# Altium PCB PCB_Main.PcbDoc (part 1 of 4)
Units mm, origin at the board's own origin, x right, y up, seen from the top; angles counter-clockwise.
Board outline 152.4 x 152.4 mm, 4 copper layers (Top Layer, GND1, GND2, Bottom Layer), stack 0.868 mm thick; 73 components, 60 nets, 294 pads, 5 vias.
Unrouted connection lines stored in the file: 166.
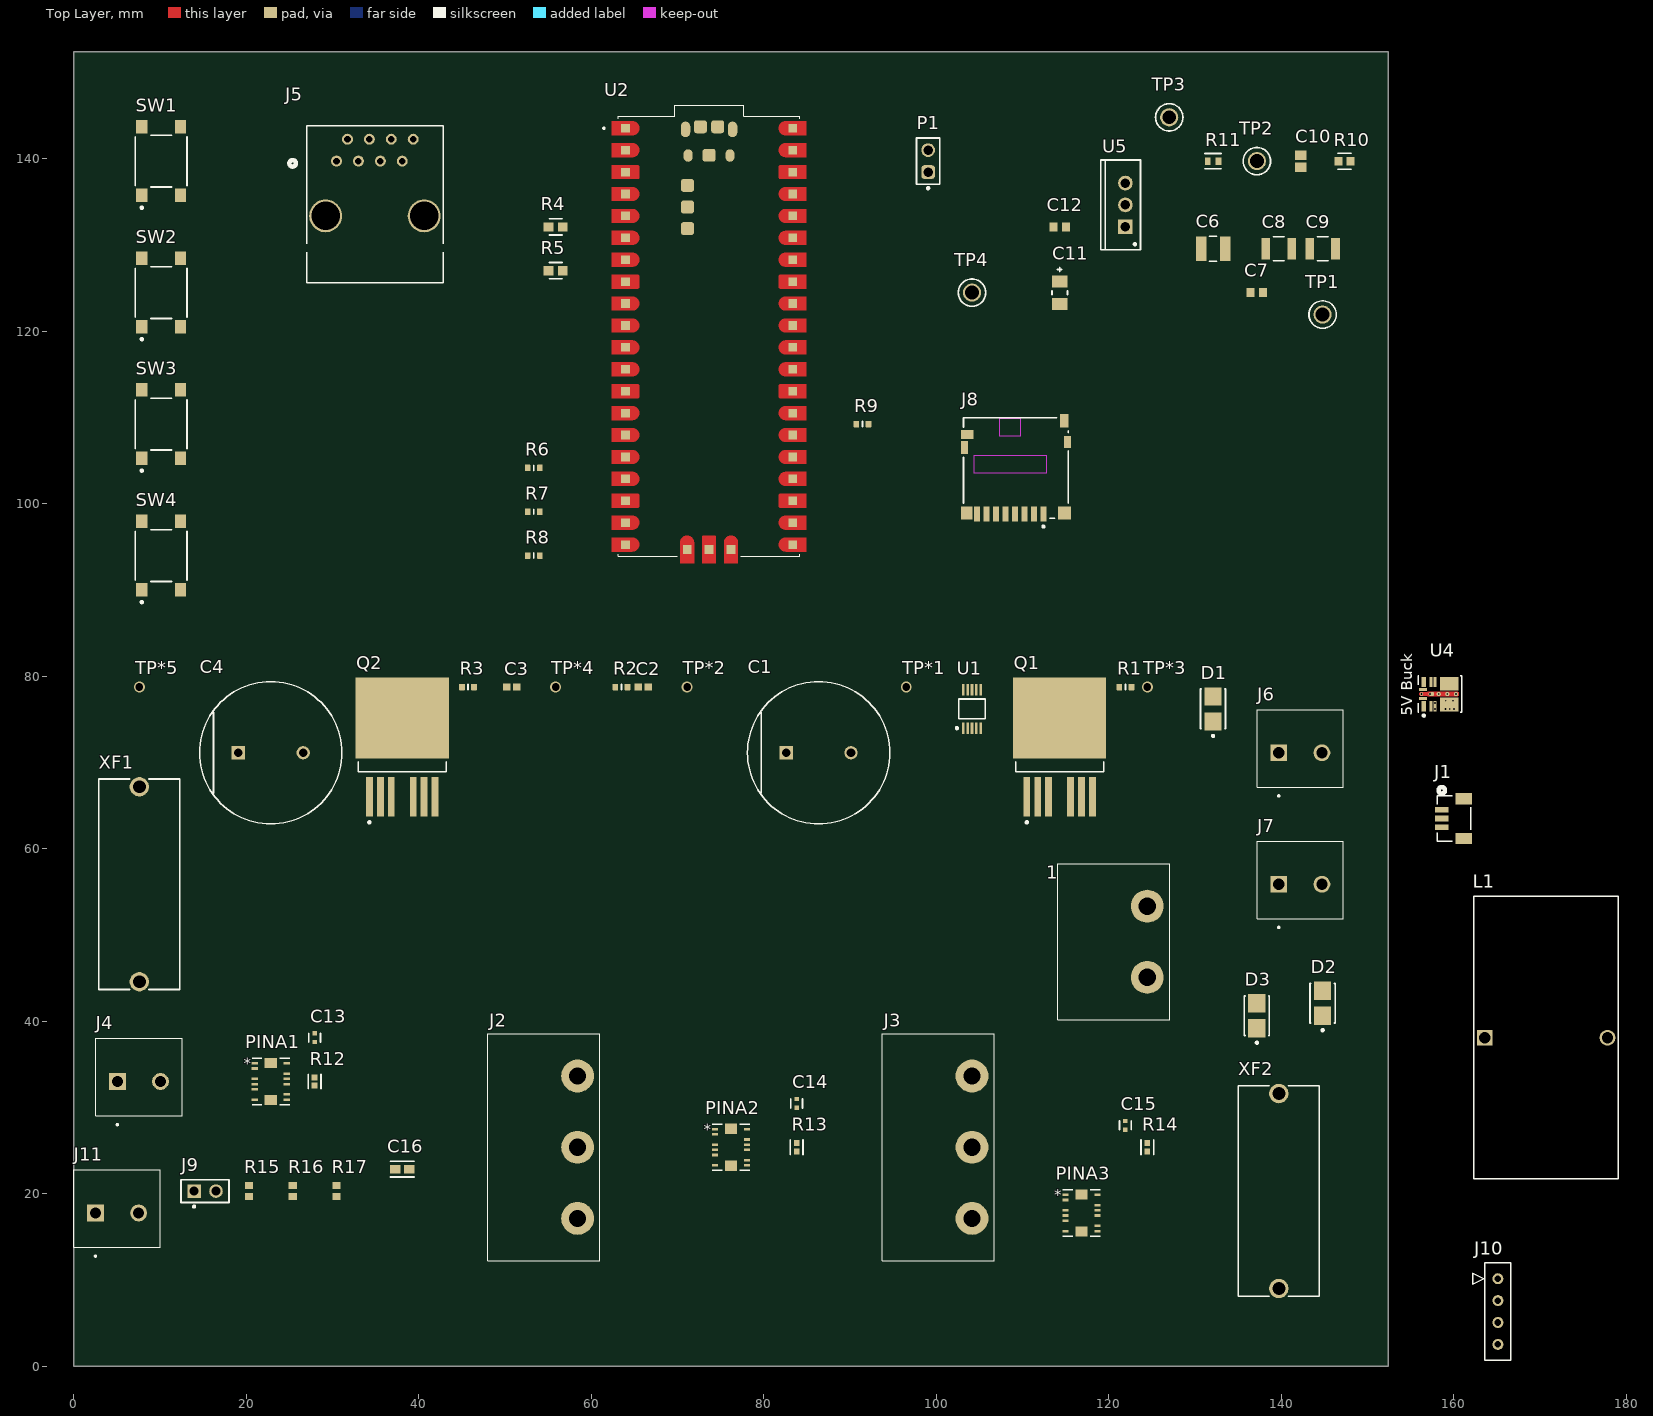
[diagram p0: Top Layer view]
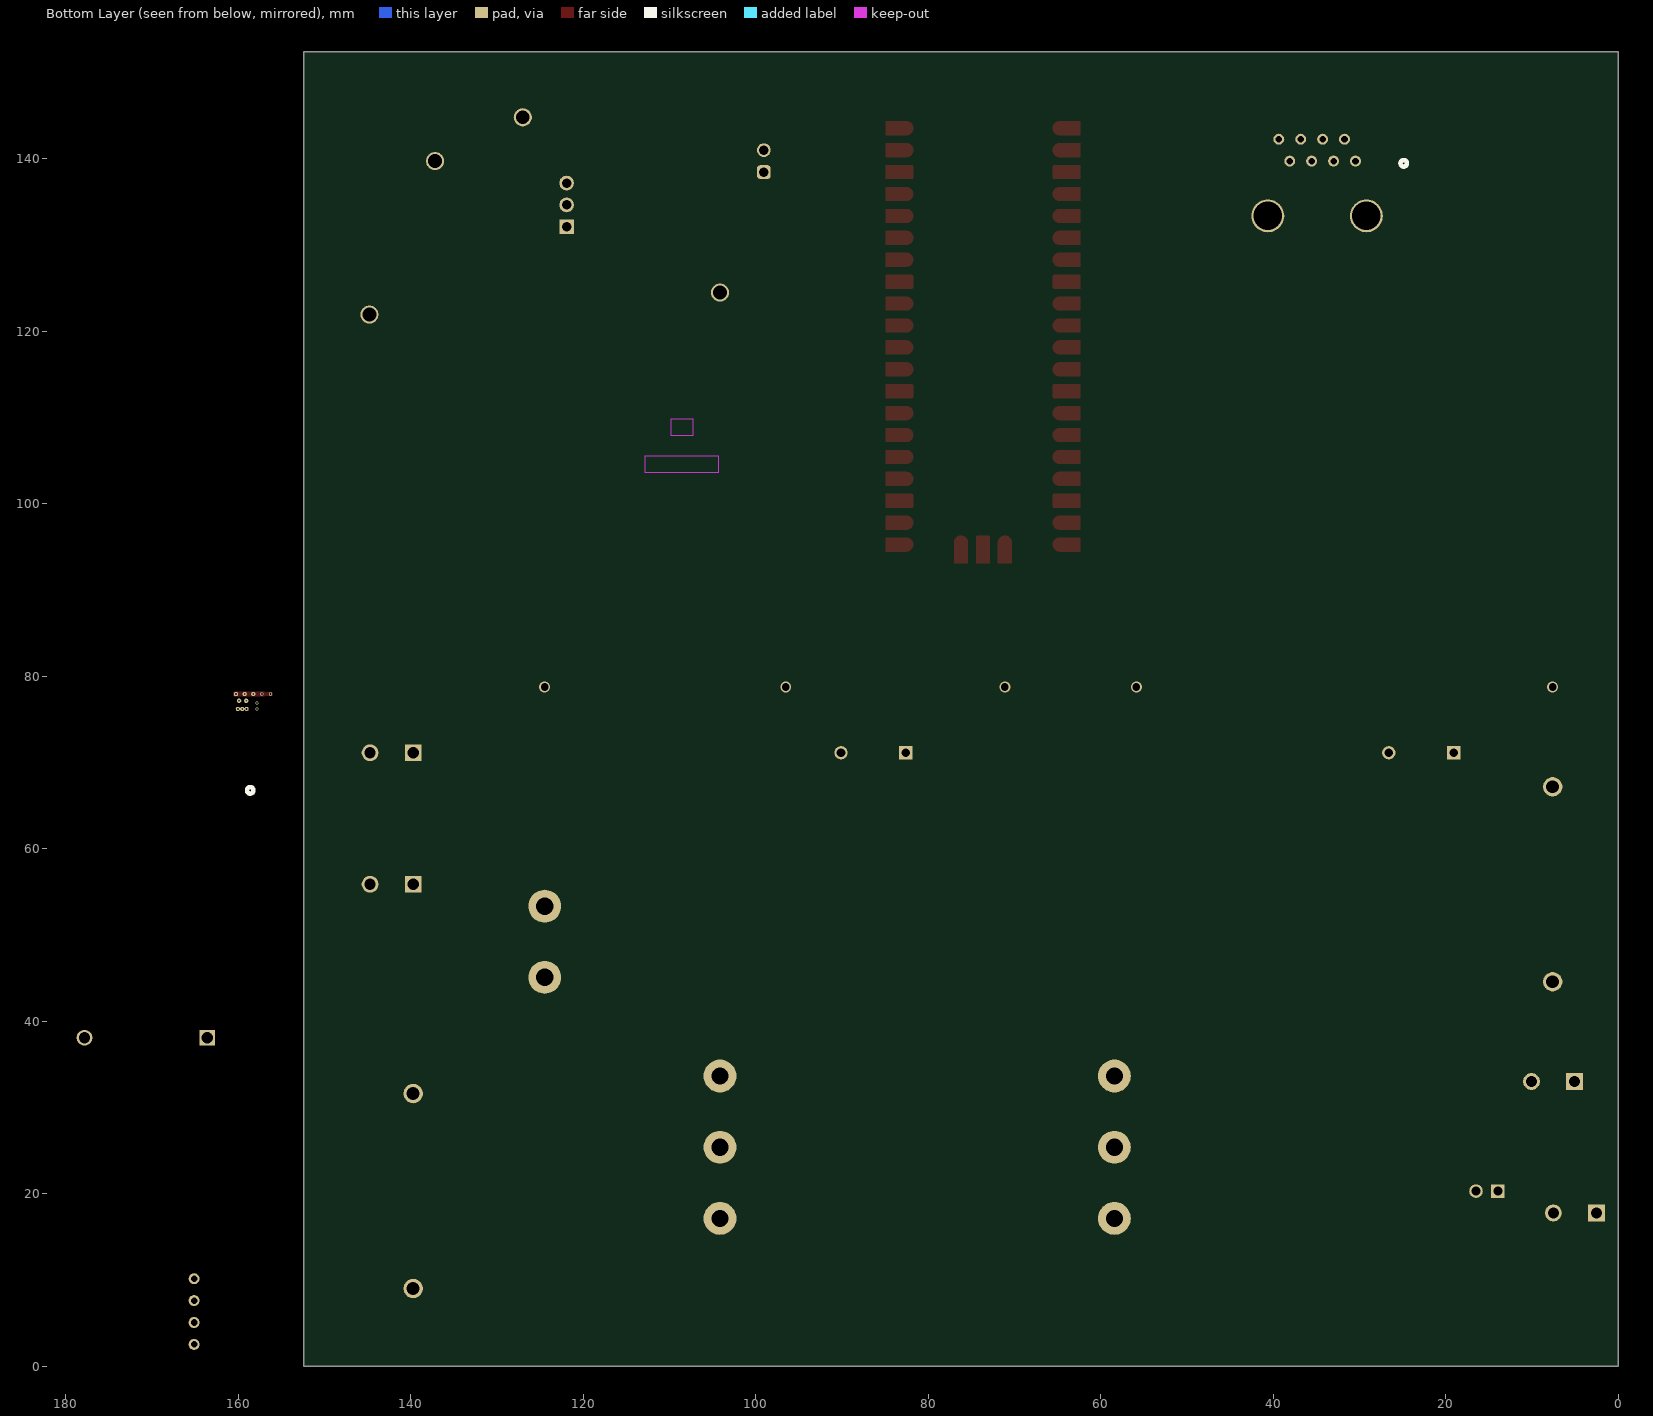
[diagram p1: Bottom Layer view, seen from below]
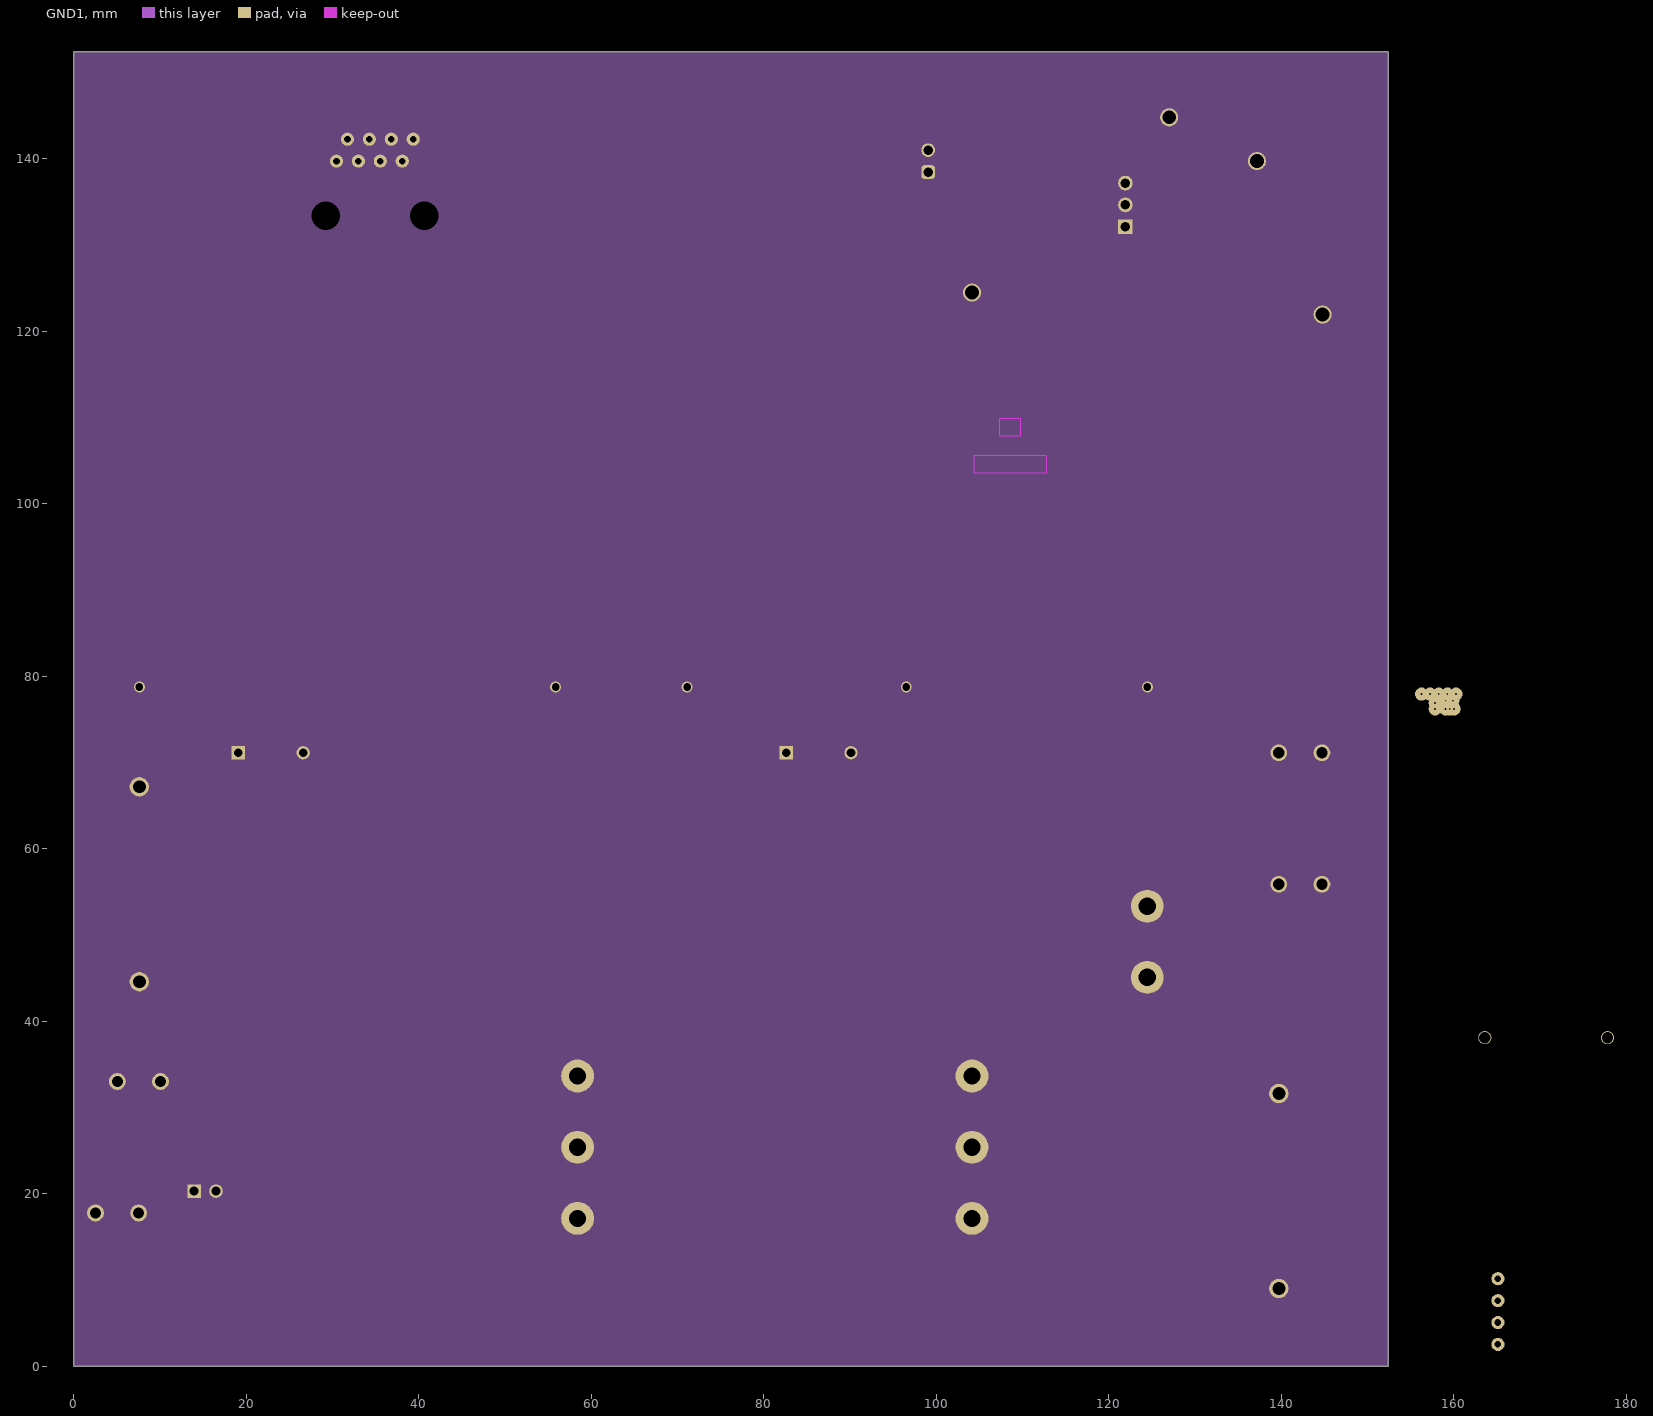
[diagram p2: GND1]
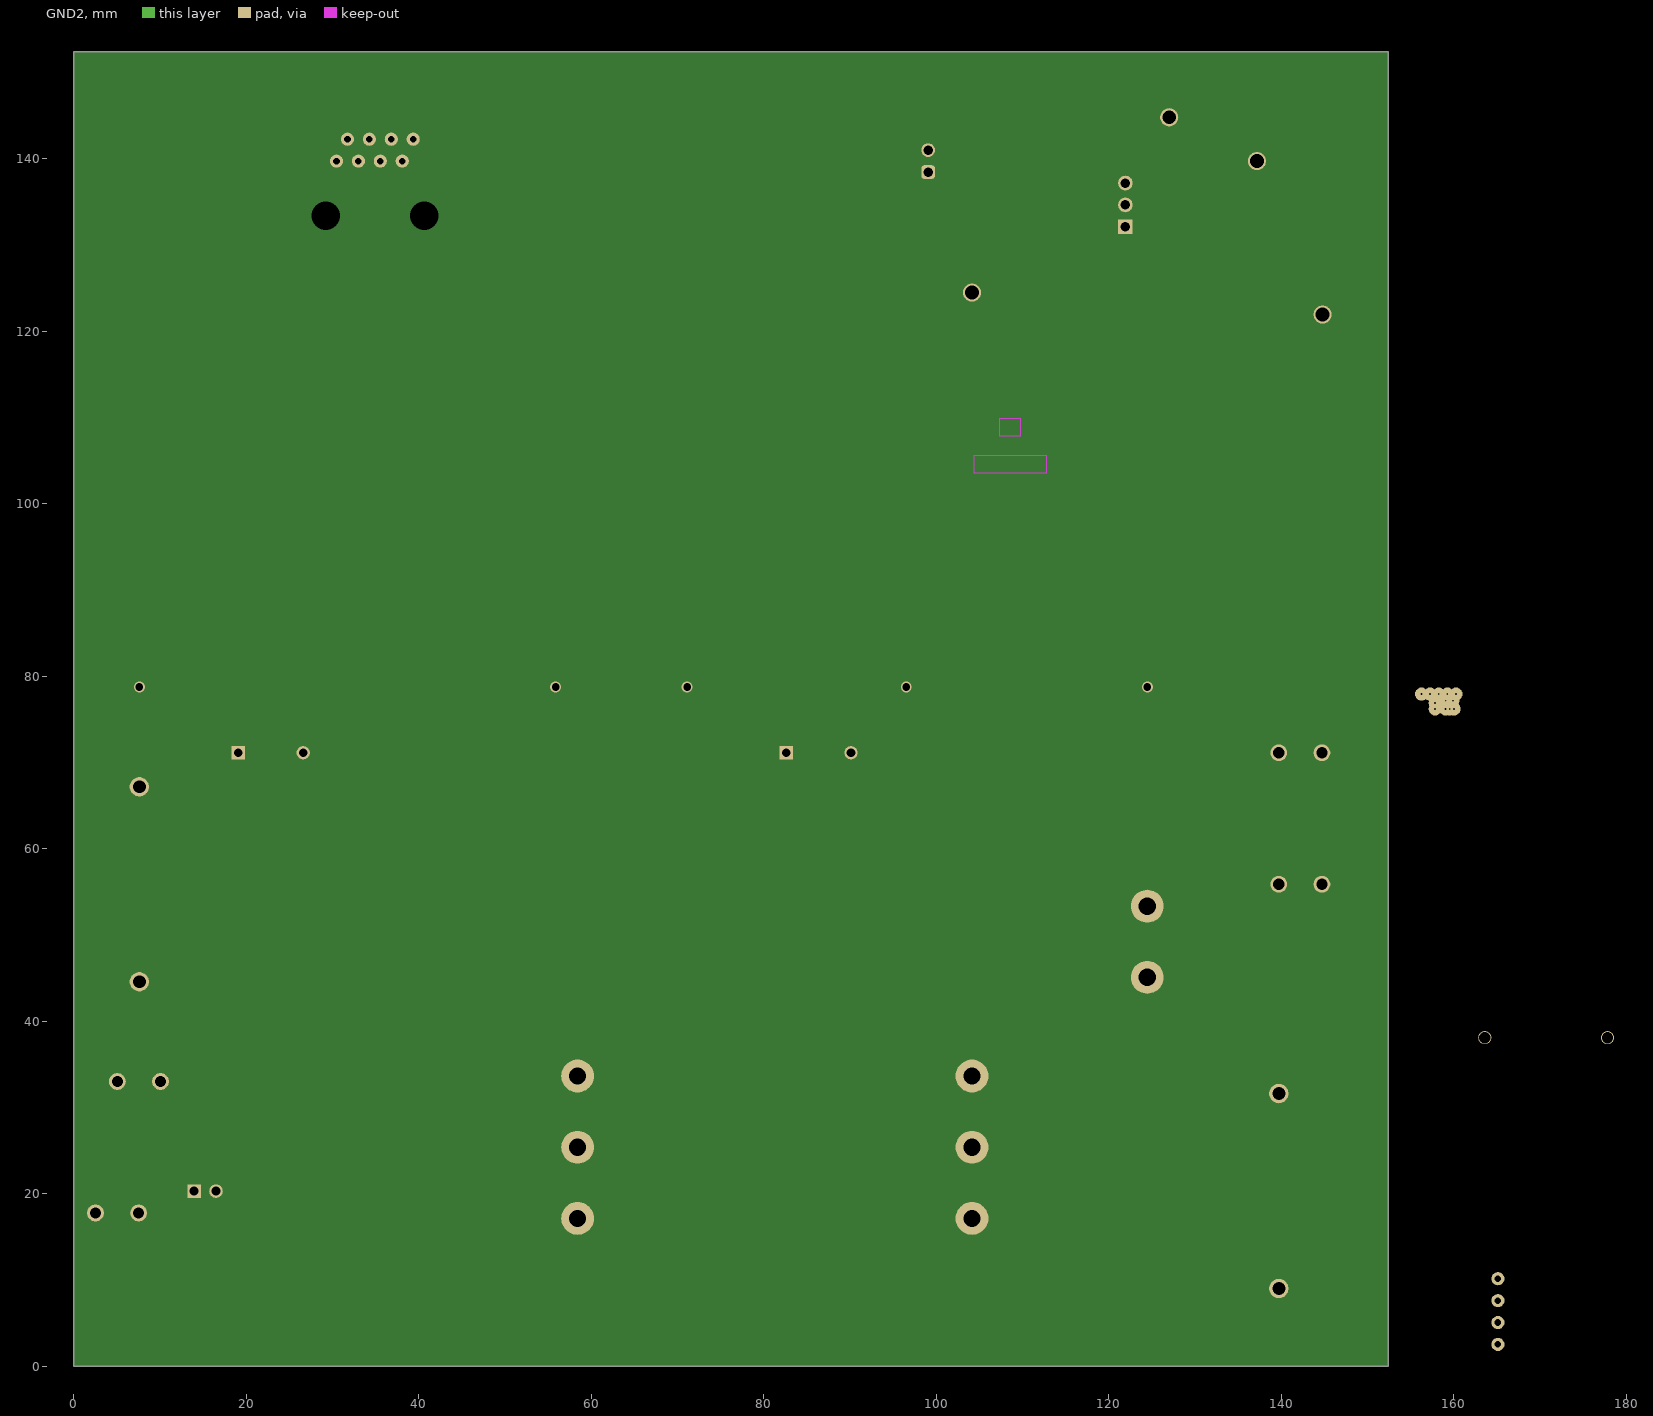
[diagram p3: GND2]

## Layer stack, top to bottom
Top Solder: solder mask 0.0102, Solder Resist, Dk 3.5
Top Layer: signal copper 0.0356
Dielectric 2: prepreg 0.2032, PP-006, Dk 4.1
GND1: signal copper 0.035
Dielectric 1: core 0.32, FR-4, Dk 4.8
GND2: signal copper 0.035
Dielectric 3: prepreg 0.2032, PP-006, Dk 4.1
Bottom Layer: signal copper 0.0356
Bottom Solder: solder mask 0.0102, Solder Resist, Dk 3.5

## Board outline
0,0 152.4,0 152.4,152.4 0,152.4

## Design rules (kind name [scope] priority, off if disabled: settings)
Clearance [All] p1: gap=0.254 ignorepadtopadclearanceinfootprint=FALSE
PolygonConnect [All] p1: connectstyle=Relief reliefconductorwidth=0.254 reliefentries=4 polygonreliefangle="90 Angle" airgapwidth=0.254
RoutingVias [All] p1: holewidth=0.711 width=1.27 viastyle="Through Hole" minholewidth=0.711 minwidth=1.27 maxholewidth=0.711 maxwidth=1.27
SolderMaskExpansion [All] p1: expansion=0.102 istentingtop=FALSE
SupplyNets "Schematic Supply Nets_6" [InNet('5V')] p1: voltage=0.000
SupplyNets "Schematic Supply Nets_5" [InNet('GND')] p2: voltage=0.000
SupplyNets "Schematic Supply Nets_4" [InNet('12V')] p3: voltage=0.000
SupplyNets "Schematic Supply Nets_3" [InNet('PV')] p4: voltage=0.000
SupplyNets "Schematic Supply Nets_1" [InNet('3.3V')] p5: voltage=0.000
Width [All] p1: maxlimit=0.254 minlimit=0.254 preferedwidth=0.254
30 further rules are at their usual default settings.

## Classes and differential pairs
component class "Voltage Regulator": C6 C7 C8 C9 C10 C11 C12 R10 R11 TP1 TP2 TP3 TP4 U4 U5
component class "Power Monitor": C13 C14 C15 PINA1 PINA2 PINA3 R12 R13 R14
component class MCU: J1 P1 R4 R5 R6 R7 R8 R9 SW1 SW2 SW3 SW4 U2
component class "DC-DC Converter": C1 C2 C3 C4 D1 L1 Q1 Q2 R1 R2 R3 TP*1 TP*2 TP*3 TP*4 TP*5 U1
component class Connectors: 1 C16 D2 D3 J2 J3 J4 J5 J6 J7 J8 J9 J10 J11 R15 R16 R17 XF1 XF2

## Components (designator, comment, footprint, x,y, rotation, side; value= is the part's Value field where it differs from the comment)
1 "OSTYK42102030" OSTYK42102030 124.46,45.09 r90 top
C1 "EEUFC2A471" FP-RAD-TH-D_16_0_5-L_40_2-MFG 86.36,71.12 r0 top
C2 "Capacitor 1 uF +/- 10% 25 V 0603" CAPC1608X90X40LL10T20 66.04,78.74 r0 top
C3 "Capacitor 1 uF +/- 10% 25 V 0603" CAPC1608X90X40LL10T20 50.8,78.74 r0 top
C4 "EEUFC2A471" FP-RAD-TH-D_16_0_5-L_40_2-MFG 22.86,71.12 r0 top
C6 "4.7uF" FP-C1210X475K5RACTU-MFG 132.08,129.54 r0 top
C7 "0.1uF" CAPC1608X90X35ML10T15 137.16,124.46 r0 top
C8 "22uF" FP-1210-L_3_3_0_4-W_2_5_0-MFG 139.7,129.54 r0 top
C9 "22uF" FP-1210-L_3_3_0_4-W_2_5_0-MFG 144.78,129.54 r0 top
C10 "1uF" CAPC2013X145X50LL20T25 142.24,139.7 r90 top
C11 "0.33uF" FP-TAJS-MFG 114.3,124.46 r90 top
C12 "0.1uF" CAPC1608X90X35ML10T15 114.3,132.08 r0 top
C13 "CC0402KRX7R7BB104" FP-CC0402-MFG 27.94,38.1 r90 top value="100 nF"
C14 "CC0402KRX7R7BB104" FP-CC0402-MFG 83.82,30.48 r90 top value="100 nF"
C15 "CC0402KRX7R7BB104" FP-CC0402-MFG 121.92,27.94 r90 top value="100 nF"
C16 "GRM188R60J106ME47D" FP-GRM188-0_1-e0_2_0_55-IPC_A 38.1,22.86 r0 top
D1 "1N4007 SMD" FP-1N4007_SMD-IPC_C 132.08,76.2 r90 top
D2 "1N4007 SMD" FP-1N4007_SMD-IPC_C 144.78,42.09 r90 top
D3 "1N4007 SMD" FP-1N4007_SMD-IPC_C 137.16,40.64 r90 top
J1 "" CONN_BM03B-SRSS-TBLFSN_JST 160.02,63.5 r90 top
J2 "OSTYK42103030" OSTYK42103030 58.42,25.4 r90 top
J3 "OSTYK42103030" OSTYK42103030 104.14,25.4 r90 top
J4 "TB001-500-02BE" CUI_TB001-500-02BE 5.08,33.02 r0 top
J5 "54602-908LF" CONN8_2-908LF_AMP 30.48,139.7 r0 top
J6 "TB001-500-02BE" CUI_TB001-500-02BE 139.7,71.12 r0 top
J7 "TB001-500-02BE" CUI_TB001-500-02BE 139.7,55.88 r0 top
J8 "DM3D-SF" FP-DM3D-SF-MFG 109.22,104.14 r0 top
J9 "M20-9990245" FP-M20-9990245-MFG 15.24,20.32 r0 top
J10 "PPTC041LFBN-RC" CONN_PPTC041LFBN-RC_SUL 165.1,10.16 r90 top
J11 "TB001-500-02BE" CUI_TB001-500-02BE 2.54,17.78 r0 top
L1 "2300HT-121-V-RC" IND_2300HT-V_56_42 163.576,38.1 r0 top
P1 "61300211121" 61300211121 99.06,139.7 r90 top
PINA1 "PINA740BIREMR" VQFN14_REM_TEX 22.86,33.02 r0 top
PINA2 "PINA740BIREMR" VQFN14_REM_TEX 76.2,25.4 r0 top
PINA3 "PINA740BIREMR" VQFN14_REM_TEX 116.84,17.78 r0 top
Q1 "IPB032N10N5ATMA1" FP-PG-TO263-7-MFG 114.3,73.66 r0 top
Q2 "IPB032N10N5ATMA1" FP-PG-TO263-7-MFG 38.1,73.66 r0 top
R1 "0R3J" RESC0603(1608)_L 121.92,78.74 r0 top value=0
R2 "0R3J" RESC0603(1608)_L 63.5,78.74 r0 top value=0
R3 "0R3J" RESC0603(1608)_L 45.72,78.74 r0 top value=0
R4 "CRCW06034K70FKEA" FP-CRCW0603-e3-IPC_A 55.88,132.08 r0 top
R5 "CRCW06034K70FKEA" FP-CRCW0603-e3-IPC_A 55.88,127 r0 top
R6 "0R3J" RESC0603(1608)_L 53.34,104.14 r0 top value=0
R7 "0R3J" RESC0603(1608)_L 53.34,99.06 r0 top value=0
R8 "0R3J" RESC0603(1608)_L 53.34,93.98 r0 top value=0
R9 "0R3J" RESC0603(1608)_L 91.44,109.22 r0 top value=0
R10 "40.2k" FP-CRCW0603-e3-IPC_B 147.32,139.7 r0 top
R11 "10k" FP-MCT0603-IPC_C 132.08,139.7 r0 top
R12 "RC0402FR-071KL" FP-RC0402-0_4-IPC_A 27.94,33.02 r90 top
R13 "RC0402FR-071KL" FP-RC0402-0_4-IPC_A 83.82,25.4 r90 top
R14 "RC0402FR-071KL" FP-RC0402-0_4-IPC_A 124.46,25.4 r90 top
R15 "10k" RESC1609X50X30NL8T20 20.32,20.32 r90 top
R16 "10k" RESC1609X50X30NL8T20 25.4,20.32 r90 top
R17 "10k" RESC1609X50X30NL8T20 30.48,20.32 r90 top
SW1 "" FP-PTS645SM43SMTR92LFS-MFG 10.16,139.7 r90 top
SW2 "" FP-PTS645SM43SMTR92LFS-MFG 10.16,124.46 r90 top
SW3 "" FP-PTS645SM43SMTR92LFS-MFG 10.16,109.22 r90 top
SW4 "" FP-PTS645SM43SMTR92LFS-MFG 10.16,93.98 r90 top
TP1 "5010" KSTN-5010_V 144.78,121.92 r0 top
TP2 "5011" KSTN-5011_V 137.16,139.7 r0 top
TP3 "5010" KSTN-5010_V 127,144.78 r0 top
TP4 "5011" KSTN-5011_V 104.14,124.46 r0 top
TP*1 "Test Point" "Test Point-Footprint-1" 96.52,78.74 r90 top
TP*2 "Test Point" "Test Point-Footprint-1" 71.12,78.74 r90 top
TP*3 "Test Point" "Test Point-Footprint-1" 124.46,78.74 r90 top
TP*4 "Test Point" "Test Point-Footprint-1" 55.88,78.74 r90 top
TP*5 "Test Point" "Test Point-Footprint-1" 7.62,78.74 r90 top
U1 "LM5106MM/NOPB" DGS0010A_N 104.14,76.2 r90 top
U2 "SC0915" MODULE_SC0915 73.66,119.38 r0 top
U4 "TLVM23625RDNR" RDN0011A-MFG 158.47,77.93 r90 top
U5 "L7812ACV" TO220 121.92,134.62 r90 top
XF1 "696108003002" 696108003002 7.62,55.88 r90 top
XF2 "696108003002" 696108003002 139.7,20.32 r90 top

## Footprints (in the part's own frame and the unit in brackets; to place one, negate y for a bottom-side part, rotate by r counter-clockwise, add the part's x,y. Pads: shape width x height; smd on the part's side, far side on the other; paste and mask are expansions set on the pad)
61300211121 [mm] "Pin Header, pitch 2.54 mm, THT, Vertical, single row, 2p"
  rrect50% 1.6x1.6 hole 1.1: 1(-1.27,0)
  round 1.6 hole 1.1: 2(1.27,0)
  silkscreen extent -3.26,-1.35 2.69,1.35, body extent -2.54,-1.27 2.54,1.27, height 8.57
696108003002 [mm] "FUSEHOLDER BLOCKS - PCB - CLIP COVER - THT"
  round 2.25 hole 1.5: 1(-11.3,0) 2(11.3,0)
  silkscreen extent -12.2,-4.7 12.2,4.7, body extent -12.2,-4.7 12.2,4.7, height 11.55
CAPC1608X90X35ML10T15 [mm] "Chip Capacitor, 2-Leads, Body 1.7x0.9mm, IPC Low Density"
  rect 0.95x1.05 smd: 1(-0.725,0) 2(0.725,0)
  body extent -0.85,-0.45 0.85,0.45, height 0.9
CAPC1608X90X40LL10T20 [mm] "Chip Capacitor, 2-Leads, Body 1.70x0.90mm, IPC High Density"
  rect 0.85x0.85 smd: 1(-0.575,0) 2(0.575,0)
  body extent -0.85,-0.45 0.85,0.45, height 0.9
CAPC2013X145X50LL20T25 [mm] "Chip Capacitor, 2-Leads, Body 2.00x1.25mm, IPC High Density"
  rect 1.1x1.35 smd: 1(-0.7,0) 2(0.7,0)
  body extent -1.1,-0.72 1.1,0.72, height 1.45
CONN8_2-908LF_AMP [mil]
  round 50 / inner round 60 / far side round 50 hole 30 paste-99999 mask+0: 1(0,0) 2(50,100) 3(100,0) 4(150,100) 5(200,0) 6(250,100) 7(300,0) 8(350,100)
  round 150 / inner round 60 / far side round 150 hole 130 paste-99999 mask-75: 9(-50,-250) 10(400,-250)
  silkscreen extent -215,-555 486,161
CONN_BM03B-SRSS-TBLFSN_JST [mil]
  rect 26x61 smd paste+0 mask+0: 1(39.37,56.24) 2(0,56.24) 3(-39.37,56.24)
  rect 51x75 smd paste-37.5 mask-37.5: 4(-90.55,-43.17) 5(90.55,-43.17)
  silkscreen extent -104,-76 143,76
CONN_PPTC041LFBN-RC_SUL [mil]
  round 50 / inner round 60 / far side round 50 hole 30 paste-99999 mask+0: 1(0,0) 2(-100,0) 3(-200,0) 4(-300,0)
  silkscreen extent -372,-59 72,114
CUI_TB001-500-02BE [mm]
  rect 1.95x1.95 / inner round 1.95 / far side rect 1.95x1.95 hole 1.3: 1(0,0)
  round 1.95 hole 1.3: 2(5,0)
  silkscreen extent -2.5,-5.1 7.5,5
DGS0010A_N [mm] "SOP, 10-Leads, Body 3.1x3.1mm, Pitch 0.5mm, IPC Medium Density"
  rrect33% 1.35x0.3 smd: 1(-2.225,1) 2(-2.225,0.5) 3(-2.225,0) 4(-2.225,-0.5) 5(-2.225,-1) 6(2.225,-1) 7(2.225,-0.5) 8(2.225,0) 9(2.225,0.5) 10(2.225,1)
  silkscreen extent -2.35,-1.55 1.15,1.87, body extent -2.45,-1.5 2.45,1.5, height 0.94
FP-1N4007_SMD-IPC_C [mm]
  rect 2.1x2 smd paste+0 mask+0: 1(-1.45,0) 2(1.45,0)
  silkscreen extent -3.25,-1.45 2.3,1.45, body extent -2.6,-1.55 2.6,1.55, height 0.25
FP-1210-L_3_3_0_4-W_2_5_0-MFG [mm]
  rect 1x2.5 smd paste+0 mask+0: 1(-1.5,0) 2(1.5,0)
  silkscreen extent -0.62,-1.4 0.62,1.4, body extent -2.1,-1.5 2.1,1.5, height 0.25
FP-C1210X475K5RACTU-MFG [mm]
  rect 1.22x2.81 smd paste+0 mask+0: 1(-1.39,0) 2(1.39,0)
  silkscreen extent -0.41,-1.45 0.41,1.45, body extent -2.12,-1.56 2.12,1.56, height 0.25
FP-CC0402-MFG [mm]
  rect 0.5x0.5 smd paste+0 mask+0: 1(-0.5,0) 2(0.5,0)
  silkscreen extent -0.53,-0.68 0.53,0.67, body extent -0.87,-0.48 0.87,0.48, height 0.25
FP-CRCW0603-e3-IPC_A [mm]
  rect 1.135x1.062 smd paste+0 mask+0: 1(-0.815,0) 2(0.815,0)
  silkscreen extent -0.75,-0.95 0.75,0.95, body extent -1.88,-1.03 1.88,1.03, height 0.25
FP-CRCW0603-e3-IPC_B [mm]
  rect 0.935x0.962 smd paste+0 mask+0: 1(-0.715,0) 2(0.715,0)
  silkscreen extent -0.75,-0.95 0.75,0.9, body extent -1.43,-0.73 1.43,0.73, height 0.25
FP-DM3D-SF-MFG [mm]
  rect 0.7x1.75 smd paste+0 mask+0: 1(3.2,-5.35) 2(2.1,-5.35) 3(1,-5.35) 4(-0.1,-5.35) 5(-1.2,-5.35) 6(-2.3,-5.35) 7(-3.4,-5.35) 8(-4.5,-5.35)
  rect 1x1.55 smd paste+0 mask+0: 9(5.6,5.45)
  rect 1.45x1 smd paste+0 mask+0: 10(-5.625,3.875)
  rect 0.8x1.4 smd paste+0 mask+0: 11(6,3.025)
  rect 0.8x1.5 smd paste+0 mask+0: 12(-5.95,2.375)
  rect 1.3x1.5 smd paste+0 mask+0: 13(-5.7,-5.225)
  rect 1.5x1.5 smd paste+0 mask+0: 14(5.65,-5.225)
  Keep-Out Layer region: -1.95,3.725 0.55,3.725 0.55,5.725 -1.95,5.725
  Keep-Out Layer region: -4.9,-0.575 3.6,-0.575 3.6,1.425 -4.9,1.425
  silkscreen extent -6.07,-6.92 6.07,5.82, body extent -6.45,-6.32 6.5,6.32, height 0.25
FP-GRM188-0_1-e0_2_0_55-IPC_A [mm]
  rect 1.208x1.012 smd paste+0 mask+0: 1(-0.802,0) 2(0.802,0)
  silkscreen extent -1.41,-0.91 1.41,0.91, body extent -1.91,-1.01 1.91,1.01, height 0.25
FP-M20-9990245-MFG [mm]
  rect 1.57x1.57 hole 1.02 paste-2539.97 mask+0: 1(-1.27,0)
  round 1.57 hole 1.02 paste-2539.97 mask+0: 2(1.27,0)
  silkscreen extent -2.79,-1.92 2.79,1.32, body extent -2.89,-1.42 2.89,1.42, height 0.25
FP-MCT0603-IPC_C [mm]
  rect 0.664x0.862 smd paste+0 mask+0: 1(-0.629,0) 2(0.629,0)
  silkscreen extent -0.96,-0.87 0.96,0.87, body extent -1.06,-0.58 1.06,0.58, height 0.25
FP-PG-TO263-7-MFG [mm]
  rect 0.8x4.6 smd paste+0 mask+0: 1(-3.81,-7.65) 2(-2.54,-7.65) 3(-1.27,-7.65) 5(1.27,-7.65) 6(2.54,-7.65) 7(3.81,-7.65)
  rect 10.8x9.4 smd paste+0 mask+0: 8(0,1.5)
  silkscreen extent -5.1,-10.72 5.1,-3.57, body extent -5.5,-10.05 5.5,6.3, height 0.25
FP-PTS645SM43SMTR92LFS-MFG [mm]
  rect 1.55x1.3 smd paste+0 mask+0: 1(-3.975,2.25) 2(3.975,2.25) 3(-3.975,-2.25) 4(3.975,-2.25)
  silkscreen extent -5.52,-3 3,3, body extent -4.85,-3.1 4.85,3.1, height 0.25
FP-RAD-TH-D_16_0_5-L_40_2-MFG [mm]
  rect 1.55x1.55 hole 1 paste-2539.97 mask+0: 1(-3.75,0)
  round 1.55 hole 1 paste-2539.97 mask+0: 2(3.75,0)
  silkscreen extent -8.25,-8.25 8.25,8.25, body extent -8.35,-8.35 8.35,8.35, height 0.25
FP-RC0402-0_4-IPC_A [mm]
  rect 0.715x0.672 smd paste+0 mask+0: 1(-0.479,0) 2(0.479,0)
  silkscreen extent -0.84,-0.74 0.84,0.74, body extent -1.04,-0.54 1.04,0.54, height 0.25
FP-TAJS-MFG [mm]
  rect 1.4x1.8 smd paste+0 mask+0: 1(-1.3,0) 2(1.3,0)
  silkscreen extent -0.23,-0.9 2.93,0.9, body extent -2.1,-1 2.1,1, height 0.25
IND_2300HT-V_56_42 [mil]
  rect 72x72 / inner round 60 / far side rect 72x72 hole 52 paste-99999 mask+0: 1(0,0)
  round 72 / inner round 60 / far side round 72 hole 52 paste-99999 mask+0: 2(560,0)
  silkscreen extent -50,-645 610,645, body extent -66,-640 584,640, height 1280
KSTN-5010_V [mm] "Test Point, Dia 3.17mm"
  round 2.1 hole 1.6: 1(0,0)
  silkscreen extent -1.59,-1.58 1.59,1.58, body extent -1.59,-1.59 1.59,1.59, height 8.13
KSTN-5011_V [mm] "Test Point, Dia 3.17mm"
  round 2.1 hole 1.6: 1(0,0)
  silkscreen extent -1.59,-1.58 1.59,1.58, body extent -1.59,-1.59 1.59,1.59, height 8.13